# EAGLE board termo2 (EAGLE 6.2)
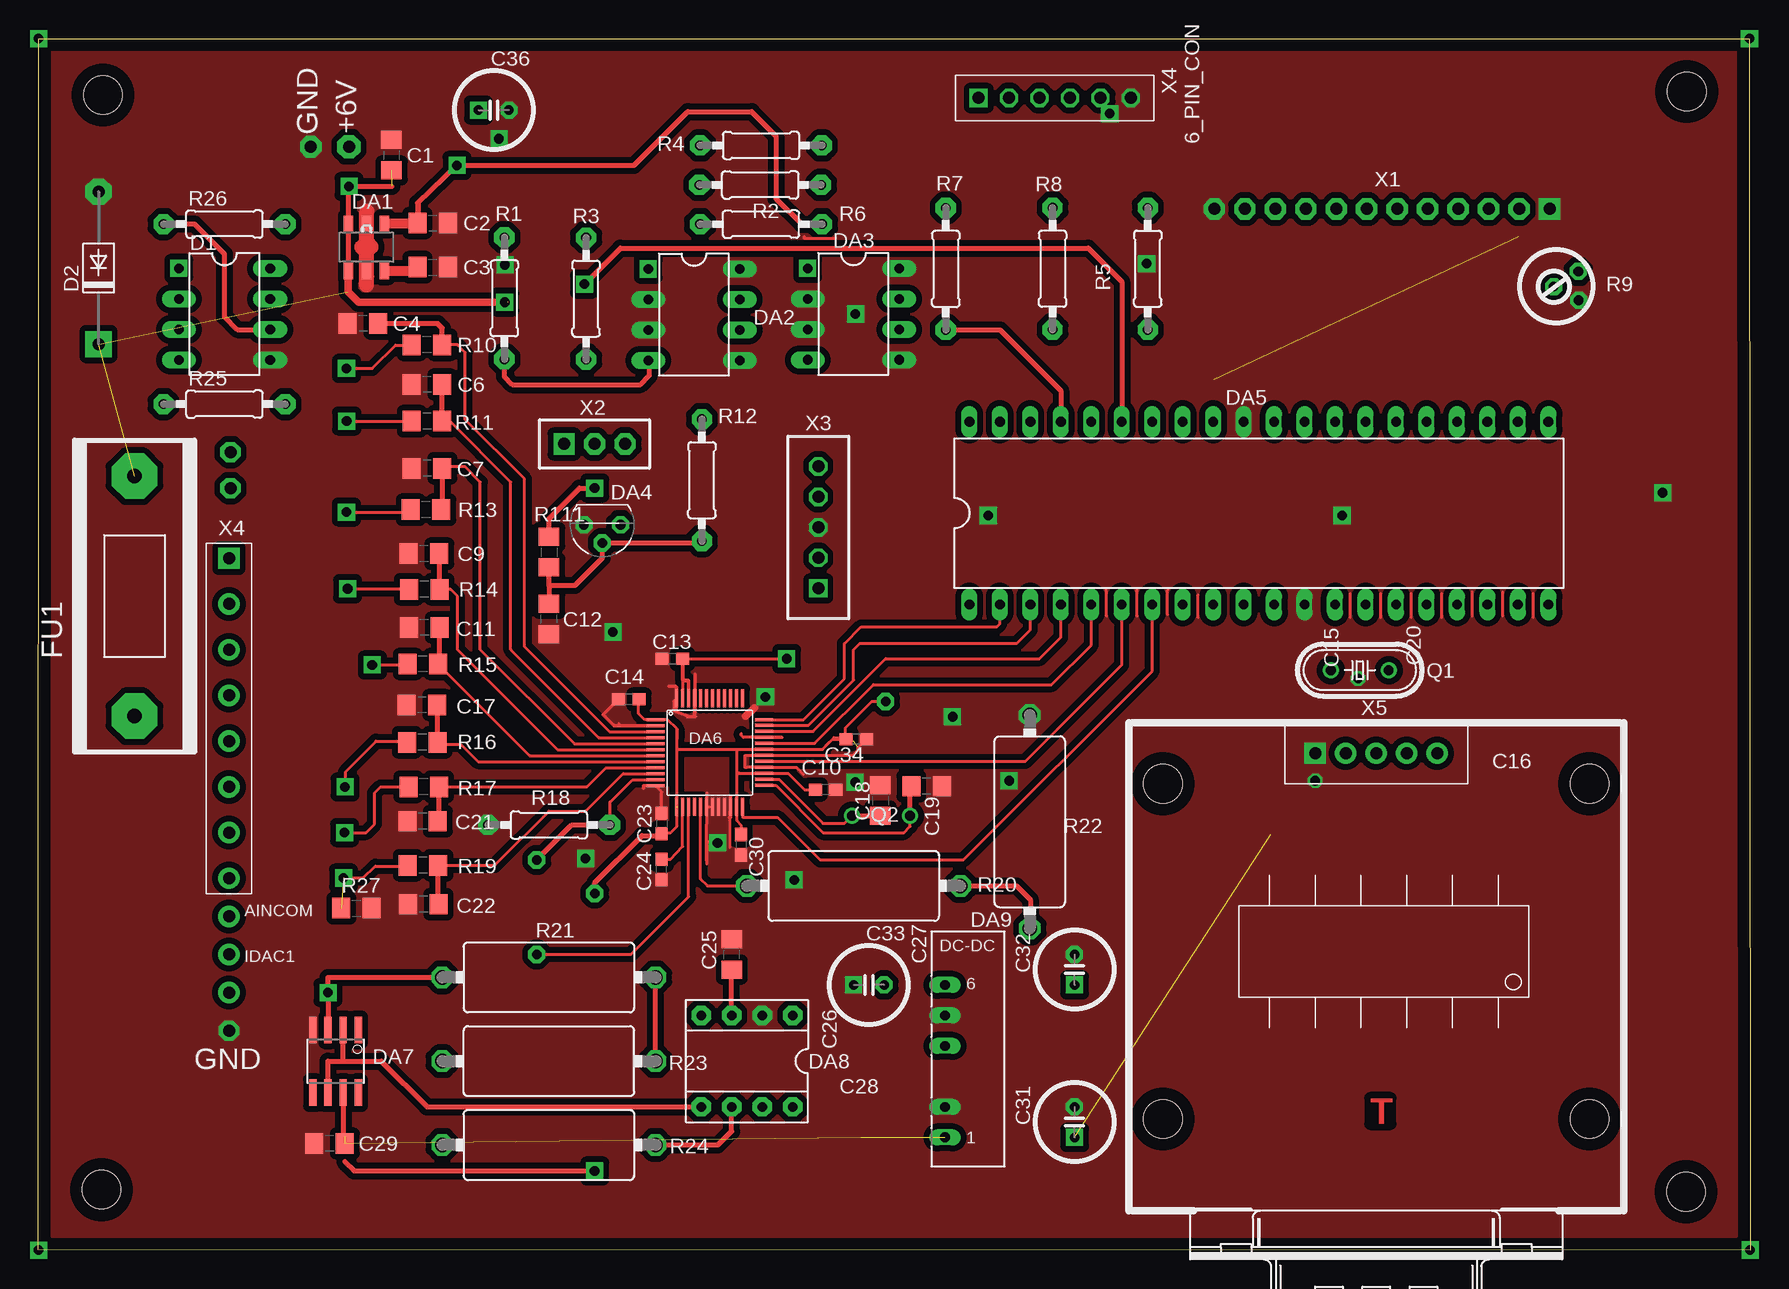
[diagram p0: board, top side]
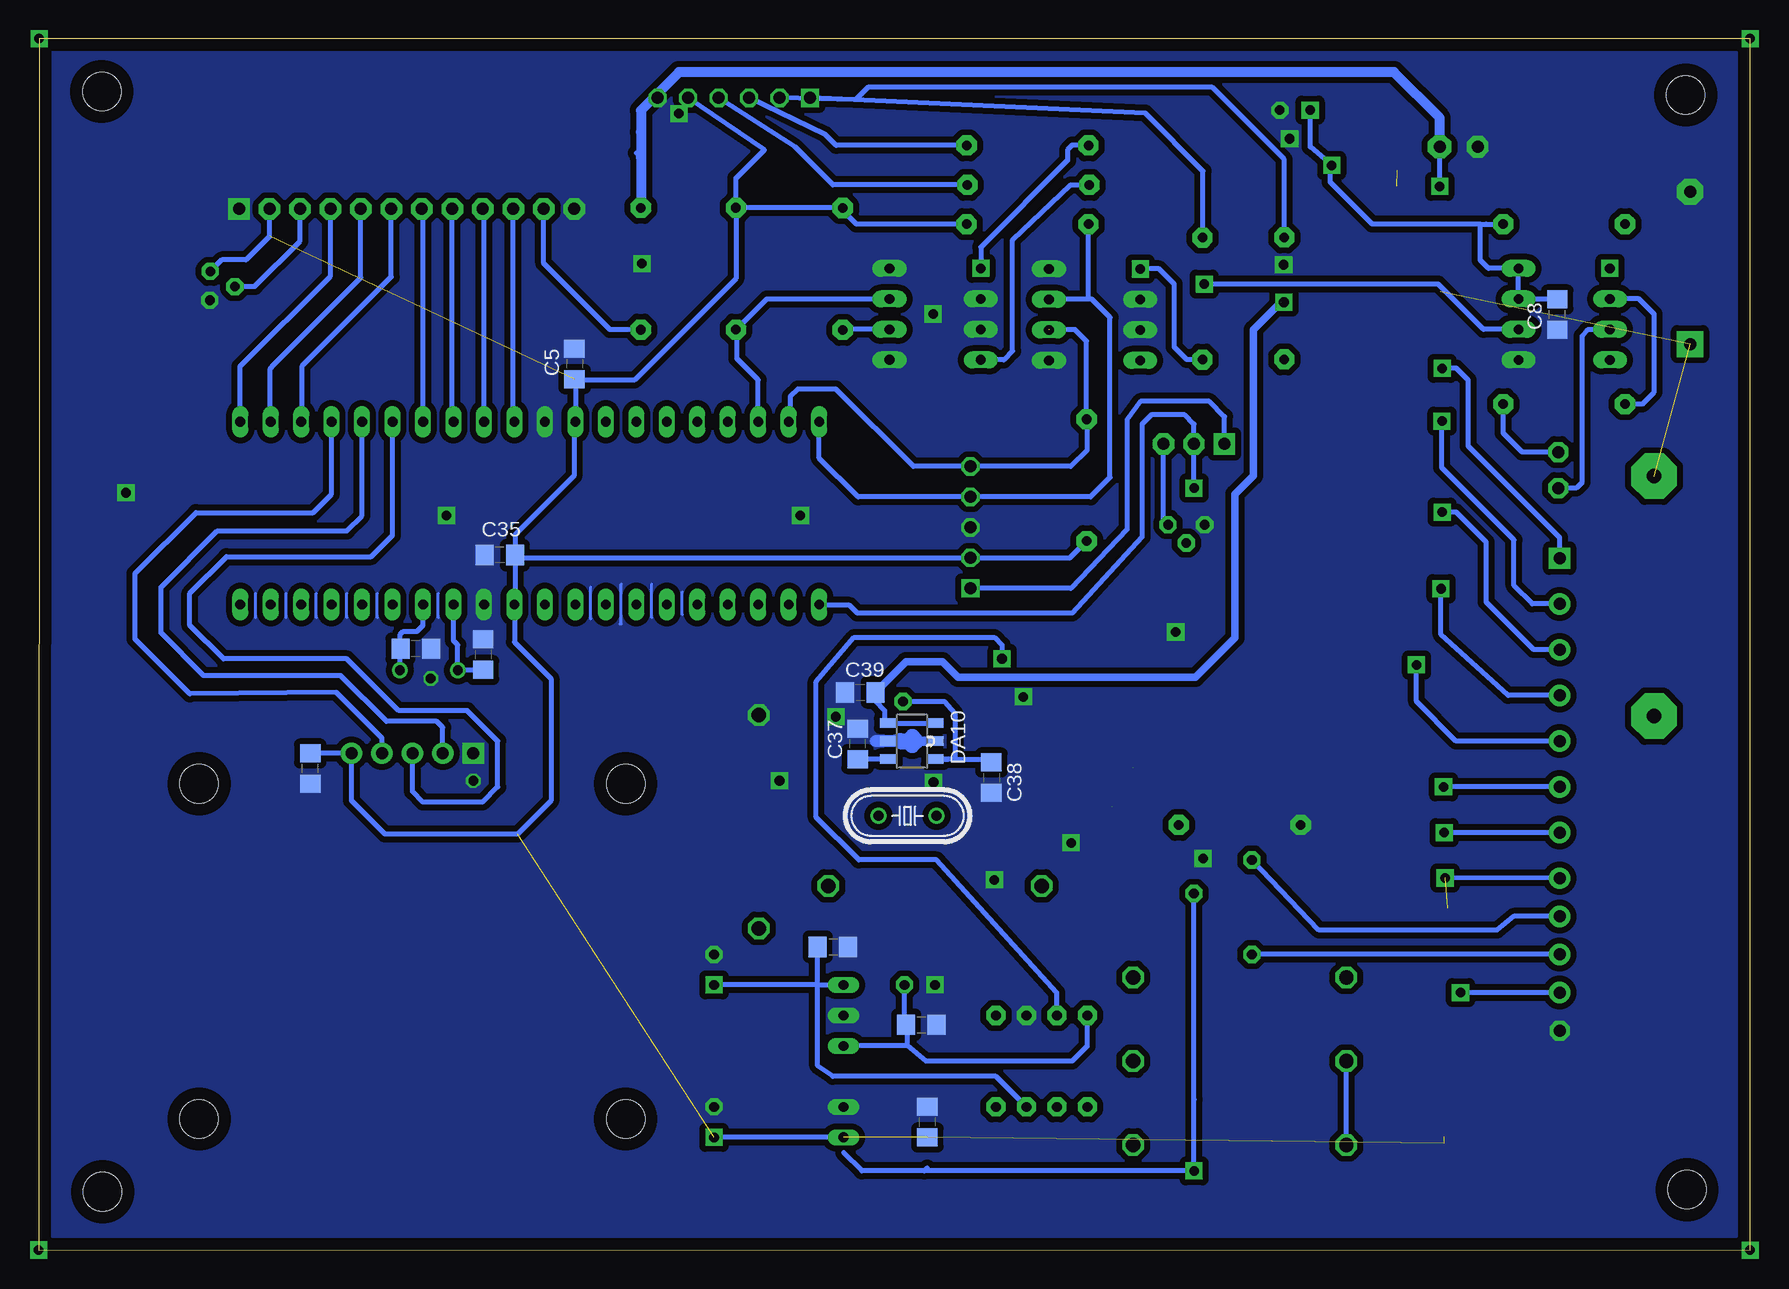
[diagram p1: board, bottom side, seen from below]

Size 142.68 x 100.97 mm. Coordinates in mm from the lower left corner, seen from the top.
Outline: 0,100.97 142.63,100.97 142.68,0 0,0.02 0,100.97
Copper layers (1*16): Top 0.035mm / dielectric 1.5mm / Bottom 0.035mm
Design rules: minimum track width 0.5mil, minimum drill 24mil, track to track 8mil, track to pad 8mil, pad to pad 8mil, via to via 8mil, smd to smd 8mil, copper to edge 40mil, drill to drill 8mil, minimum pad ring 10mil, minimum via ring 8mil, stop-mask expansion 4mil, vias tented up to drill 0mil, thermal gap 10mil
Holes 3.2 mm at 5.37,96.27 137.4,96.57 137.33,4.87 5.25,5.05

## Footprints (pad centres in the part's own frame; a part is rotated, then mirrored left to right if it is on the bottom)
8_PIN_CON = drill 1 pad 1.778 square: P$1 -12.7,0.635 | drill 1 pad 1.778: P$2 -8.89,0.635; P$3 -5.08,0.635; P$4 -1.27,0.635; P$5 2.54,0.635; P$6 6.35,0.635; P$7 10.16,0.635; P$8 13.97,0.635
C0805D = smd 1.5 x 1.7: 1 -1.27,0; 2 1.27,0
C0603 = smd 1.1 x 1: 1 -0.85,0; 2 0.85,0
C100MILX6X12 = drill 0.8 pad 1.422 octagon: MINUS 1.27,0 | drill 0.8 pad 1.422 square: PLUS -1.27,0
DIL08 = drill 0.8 pad 1.422 square: 1 -3.81,-3.81 | drill 0.8 pad 1.422 long: 2 -1.27,-3.81; 3 1.27,-3.81; 4 3.81,-3.81; 5 3.81,3.81; 6 1.27,3.81; 7 -1.27,3.81; 8 -3.81,3.81
DO41-10 = drill 1 pad 2.184 octagon: A 12.7,0 | drill 1 pad 2.184 square: C 0,0
SOT89-5 = smd 0.8 x 1.4: 1 -1.499,-1.981; 2 0,-1.981; 3 1.499,-1.981; 4 1.499,1.919; 5 -1.499,1.919; 21 0,1.919
CNY_DIP8 = drill 0.8 pad 1.422 square: 1 -3.81,-3.81 | drill 0.8 pad 1.422 long: 2 -1.27,-3.81; 3 1.27,-3.81; 4 3.81,-3.81; 5 3.81,3.81; 6 1.27,3.81; 7 -1.27,3.81; 8 -3.81,3.81
TO92-60 = drill 0.8 pad 1.422 octagon: 1 -1.524,0; 2 0,1.524; 3 1.524,0
DIL40 = drill 0.813 long: 1 -24.13,-7.62; 2 -21.59,-7.62; 3 -19.05,-7.62; 4 -16.51,-7.62; 5 -13.97,-7.62; 6 -11.43,-7.62; 7 -8.89,-7.62; 8 -6.35,-7.62; 9 -3.81,-7.62; 10 -1.27,-7.62; 11 1.27,-7.62; 12 3.81,-7.62; 13 6.35,-7.62; 14 8.89,-7.62; 15 11.43,-7.62; 16 13.97,-7.62; 17 16.51,-7.62; 18 19.05,-7.62; 19 21.59,-7.62; 20 24.13,-7.62; 21 24.13,7.62; 22 21.59,7.62; 23 19.05,7.62; 24 16.51,7.62; 25 13.97,7.62; 26 11.43,7.62; 27 8.89,7.62; 28 6.35,7.62; 29 3.81,7.62; 30 1.27,7.62; 31 -1.27,7.62; 32 -3.81,7.62; 33 -6.35,7.62; 34 -8.89,7.62; 35 -11.43,7.62; 36 -13.97,7.62; 37 -16.51,7.62; 38 -19.05,7.62; 39 -21.59,7.62; 40 -24.13,7.62
ADS1216_PAC = smd 0.25 x 1.5: 1 -2.52,-3.258; 2 -2.02,-3.258; 3 -1.52,-3.258; 4 -1.02,-3.258; 5 -0.52,-3.258; 6 -0.02,-3.258; 7 0.48,-3.258; 8 0.98,-3.258; 9 1.48,-3.258; 10 1.98,-3.258; 11 2.48,-3.258; 12 2.98,-3.258; 25 2.955,5.792; 26 2.455,5.792; 27 1.955,5.792; 28 1.455,5.792; 29 0.955,5.792; 30 0.455,5.792; 31 -0.045,5.792; 32 -0.545,5.792; 33 -1.045,5.792; 34 -1.545,5.792; 35 -2.045,5.792; 36 -2.533,5.785 | smd 1.5 x 0.25: 13 4.73,-1.483; 14 4.73,-0.983; 15 4.73,-0.483; 16 4.73,0.017; 17 4.73,0.517; 18 4.73,1.017; 19 4.73,1.517; 20 4.73,2.017; 21 4.73,2.517; 22 4.73,3.017; 23 4.73,3.517; 24 4.73,4.017; 37 -4.32,4.017; 38 -4.32,3.517; 39 -4.32,3.017; 40 -4.32,2.517; 41 -4.32,2.017; 42 -4.32,1.517; 43 -4.32,1.017; 44 -4.32,0.517; 45 -4.32,0.017; 46 -4.32,-0.483; 47 -4.32,-0.983; 48 -4.32,-1.483
SO08 = smd 0.61 x 2.21: 1 -1.905,-2.616; 2 -0.635,-2.616; 3 0.635,-2.616; 4 1.905,-2.616; 5 1.905,2.616; 6 0.635,2.616; 7 -0.635,2.616; 8 -1.905,2.616
DIL08' = drill 0.813 pad 1.6 octagon: 1 -3.81,-3.81; 2 -1.27,-3.81; 3 1.27,-3.81; 4 3.81,-3.81; 5 3.81,3.81; 6 1.27,3.81; 7 -1.27,3.81; 8 -3.81,3.81
NMA = drill 0.813 long: 1 0,6.35; 2 0,3.81; 4 0,-1.27; 5 0,-3.81; 6 0,-6.35
FUSE5X20 = drill 1.2 pad 3.81 octagon: P$1 -10,0; P$2 10,0
1_PIN_CON = drill 1 pad 1.676 octagon: P$1 0,0
HC49/S = drill 0.813: 1 -2.413,0; 2 2.413,0
0207/10 = drill 0.8 pad 1.676 octagon: 1 -5.08,0; 2 5.08,0
RTRIM3329H = drill 0.8 pad 1.422 octagon: 1 -0.599,-2.024; 2 1.805,-1.985; 3 0.537,0.066
R0805D = smd 1.5 x 1.7: P$1 -1.27,0; P$2 1.27,0
V235/17 = drill 1.194 octagon: 1 -8.89,0; 2 8.89,0
WINSTAR16X4_12 = drill 1 pad 1.778 square: P$1 -13.97,1.27 | drill 1 pad 1.778 octagon: P$2 -11.43,1.27; P$3 -8.89,1.27; P$4 -6.35,1.27; P$5 -3.81,1.27; P$6 -1.27,1.27; P$7 1.27,1.27; P$8 3.81,1.27; P$9 6.35,1.27; P$10 8.89,1.27; P$11 11.43,1.27; P$12 13.97,1.27
PLC-3PIN = drill 1 pad 1.778 square: P$1 0,0 | drill 1 pad 1.778 octagon: P$2 2.54,0; P$3 5.08,0
PLC-5PIN = drill 1 square: P$1 0,5.08 | drill 1 octagon: P$2 0,2.54; P$3 0,0; P$4 0,-2.54; P$5 0,-5.08
6_IN_PINS = drill 1 pad 1.422 square: P$1 0,0 | drill 1 pad 1.422 octagon: P$2 2.54,0; P$3 5.08,0; P$4 7.62,0; P$5 10.16,0; P$6 12.7,0
KM_RS_232 = drill 1 pad 1.778 square: 1 20.32,5.08 | drill 1 pad 1.778: 2 20.32,2.54; 3 20.32,0; 4 20.32,-2.54; 5 20.32,-5.08 | hole 3.2: -10.16,17.78; -10.16,-17.78; 17.78,17.78; 17.78,-17.78

## Placement (x,y rotation side)
8_PIN_1  [8_PIN_CON]  15.24,44.96 270 top
C1  0.1u  [C0805D]  29.42,91.26 270 top
C2  1u  [C0805D]  32.86,85.6 0 top
C3  0.01u  [C0805D]  32.86,81.92 0 top
C4  1n  [C0805D]  27.06,77.22 180 top
C5  [C0805D]  98,73.87 270 bottom
C6  [C0805D]  32.39,72.14 180 top
C7  [C0805D]  32.39,65.16 180 top
C8  0.1u  [C0805D]  16.08,77.96 90 bottom
C9  [C0805D]  32.14,58.04 180 top
C10  [C0603]  65.61,38.38 180 top
C11  [C0805D]  32.17,51.89 180 top
C12  0.1u  [C0805D]  42.56,52.58 90 top
C13  0.1u  [C0603]  52.84,49.28 180 top
C14  0.1u  [C0603]  49.21,45.9 180 top
C15  12p  [C0805D]  105.62,49.64 270 bottom
C16  0.1u  [C0805D]  120.02,40.14 90 bottom
C17  [C0805D]  31.98,45.43 180 top
C18  [C0805D]  70.18,37.48 270 top
C19  [C0805D]  74.03,38.66 180 top
C20  12p  [C0805D]  111.23,50.12 180 bottom
C21  [C0805D]  32.02,35.75 180 top
C22  [C0805D]  32.08,28.83 180 top
C23  0.1u  [C0603]  51.95,35.57 270 top
C24  1n  [C0603]  51.95,31.73 90 top
C25  0.1u  [C0805D]  57.79,24.64 90 top
C26  0.1u  [C0805D]  69.09,18.79 0 bottom
C27  0.1u  [C0805D]  76.46,25.28 0 bottom
C28  0.1u  [C0805D]  68.58,10.67 90 bottom
C29  0.1u  [C0805D]  24.26,8.9 180 top
C30  0.1u  [C0603]  58.55,33.79 270 top
C31  [C100MILX6X12]  86.36,10.67 90 top
C32  [C100MILX6X12]  86.36,23.37 90 top
C33  [C100MILX6X12]  69.22,22.1 0 top
C34  0.1u  [C0603]  68.16,42.58 180 top
C35  0.1u  [C0805D]  104.22,57.93 180 bottom
C36  [C100MILX6X12]  37.94,95 0 top
C37  0.01u  [C0805D]  74.39,42.19 90 bottom
C38  1u  [C0805D]  63.25,39.38 270 bottom
C39  0.1u  [C0805D]  74.17,46.49 0 bottom
D1  6N137  [DIL08]  15.5,78.01 270 top
D2  1N5061  [DO41-10]  5,75.51 90 top
DA1  NJM2880  [SOT89-5]  27.34,83.6 0 top
DA2  CNY74-H  [CNY_DIP8]  54.64,77.96 270 top
DA3  CNY74-H  [CNY_DIP8]  67.93,78.01 270 top
DA4  DS1811  [TO92-60]  46.99,60.46 180 top
DA5  PIC18F4320_40  [DIL40]  101.73,61.42 0 top
DA6  ADS1216ADS1216  [ADS1216_PAC]  54.69,41.69 270 top
DA7  OPA340U  [SO08]  24.77,15.75 180 top
DA8  INA128P  [DIL08']  59.06,15.75 180 top
DA9  [NMA]  75.57,15.75 180 top
DA10  NJM2880  [SOT89-5]  69.85,42.42 270 bottom
FU1  [FUSE5X20]  8,54.51 90 top
P1  1_PIN_CON  [1_PIN_CON]  16,66.51 0 top
P2  1_PIN_CON  [1_PIN_CON]  16,63.51 0 top
Q1  [HC49/S]  110.14,48.34 0 top
Q2  [HC49/S]  70.24,36.2 180 bottom
R1  330  [0207/10]  38.84,79.32 90 top
R2  330  [0207/10]  60.17,88.77 0 top
R3  330  [0207/10]  45.64,79.3 270 top
R4  330  [0207/10]  60.22,92.06 180 top
R5  1k  [0207/10]  92.47,81.78 270 top
R6  4k7  [0207/10]  60.23,85.5 0 top
R7  4k7  [0207/10]  75.63,81.77 90 top
R8  4k7  [0207/10]  84.54,81.79 90 top
R9  [RTRIM3329H]  126.37,79.76 90 top
R10  1k  [R0805D]  32.39,75.44 180 top
R11  [R0805D]  32.39,69.09 180 top
R12  4k7  [0207/10]  55.3,64.17 270 top
R13  [R0805D]  32.3,61.71 180 top
R14  [R0805D]  32.16,55.07 180 top
R15  [R0805D]  32.05,48.85 180 top
R16  [R0805D]  31.99,42.32 180 top
R17  [R0805D]  32.11,38.61 180 top
R18  100k  [0207/10]  42.55,35.44 180 top
R19  [R0805D]  32.05,32.07 180 top
R20  100k  [V235/17]  67.95,30.36 0 top
R21  250k  [V235/17]  42.55,22.74 0 top
R22  100k  [V235/17]  82.63,35.7 90 top
R23  250k  [V235/17]  42.55,15.75 180 top
R24  250k  [V235/17]  42.55,8.77 0 top
R25  330  [0207/10]  15.5,70.51 0 top
R26  1k  [0207/10]  15.5,85.51 0 top
R27  10k  [R0805D]  26.5,28.51 0 top
R111  10k  [R0805D]  42.56,58.17 270 top
X1  [WINSTAR16X4_12]  111.99,88.04 180 top
X2  [PLC-3PIN]  43.82,67.19 0 top
X3  [PLC-5PIN]  65,60.23 180 top
X4  6_PIN_CON  [6_IN_PINS]  78.36,96.02 0 top
X5  [KM_RS_232]  111.51,21.09 90 top

## Library data of the parts
8_PIN_1 DA2 DA3 DA6 P1 P2 R9 X1 X4 X5 = Dmitry
C1-C9 C11 C12 C15-C22 C25-C29 C31-C33 C35-C39 D1 D2 DA1 DA4 DA10 FU1 R1-R8 R10-R19 R25-R27 R111 X2 X3 = den
C10 C13 C14 C23 C24 C30 C34 R20-R24 = rcl
DA5 = microchip
DA7 DA8 = burr-brown
DA9 = dc-dc-converter
Q1 Q2 = crystal

## Nets
1: DA5.1 R111.P$1 X2.P$2
+5V: C2.1 C5.2 C8.2 C12.2 C16.2 C28.1 C29.1 C31.PLUS C35.1 C36.PLUS D1.7 D1.8 DA1.4 DA4.2 DA5.11 DA5.32 DA7.7 DA9.1 R6.2 R7.2 R8.2 R9.2 R12.2 R26.2 R111.P$2 X1.P$2 X3.P$2 X4.P$5 X5.5
+5V_AVDD: C10.2 C14.1 C23.2 C30.1 C34.2 C38.1 DA6.1 DA6.13 DA6.23 DA6.27 DA6.31 DA10.4
+6V: C1.2 C39.2 D2.C DA1.1 DA1.5 DA10.1 DA10.5 FU1.P$2 R5.1
AINCOM: DA6.11 R18.1
D_IN: DA5.3 DA6.35
D_OUT: DA5.2 DA6.36
DB4: DA5.27 X1.P$7
DB5: DA5.28 X1.P$8
DB6: DA5.29 X1.P$9
DB7: DA5.30 X1.P$10
DRDY: DA5.5 DA6.32
DSYNC: DA5.6 DA6.29
E: DA5.23 X1.P$6
IDAC1: DA6.15
IN1.1: C4.1 DA6.3 R10.P$1
IN1.2: C6.1 DA6.4 R11.P$1
IN2.1: C7.1 DA6.5 R13.P$1
IN2.2: C9.1 DA6.6 R14.P$1
IN3.1: C11.1 DA6.7 R15.P$1
IN3.2: C17.1 DA6.8 R16.P$1
IN4.1: C21.1 DA6.9 R17.P$1
IN4.2: C22.1 DA6.10 R19.P$1
INA_OUT: DA7.3 R21.1
K1: X4.P$1
K2: R1.2 X4.P$2
K3: R4.1 X4.P$3
K4: R2.2 X4.P$4
KN1,PGD: DA2.7 DA5.40 R6.1 X3.P$4
KN2,PGC: DA2.6 DA5.39 R12.1 X3.P$5
KN3: DA3.7 DA5.38 R8.1
KN4: DA3.6 DA5.37 R7.1
MCLR: X2.P$1 X3.P$1
N$1: C15.2 DA5.13 Q1.1
N$2: C20.2 DA5.14 Q1.2
N$3: DA2.4 R1.1
N$4: C3.1 DA1.3
N$7: C24.2 DA6.14
N$8: DA4.1 X2.P$3
N$10: C19.2 DA6.25 Q2.2
N$11: C18.2 DA6.26 Q2.1
N$13: 8_PIN_1.P$6 R16.P$2
N$14: 8_PIN_1.P$1 R10.P$2
N$15: 8_PIN_1.P$2 R11.P$2
N$16: 8_PIN_1.P$7 R17.P$2
N$17: DA3.1 R4.2
N$18: 8_PIN_1.P$8 R19.P$2 R27.P$1
N$19: DA3.4 R2.1
N$20: R5.2 X1.P$11
N$28: 8_PIN_1.P$5 R15.P$2
N$29: C27.1 C32.PLUS DA8.7 DA9.6
N$30: 8_PIN_1.P$3 R13.P$2
N$31: 8_PIN_1.P$4 R14.P$2
N$45: DA7.2 DA7.6 DA8.5
N$47: DA8.6 R24.2
N$51: C26.1 C33.MINUS DA8.4 DA9.4
N$56: DA5.26 X5.3
N$58: DA5.25 X5.2
N$59: DA5.24 X5.4
N$62: R23.2 R24.1
N$63: R21.2 R23.1
N$64: DA6.17 R20.1
N$65: R20.2 R22.1
N$105: C37.1 DA10.3
N$106: R3.1
N$108: D1.6 DA5.35 R26.1
N$109: D1.2 R25.1
N$110: D1.3 P2.P$1
N$112: P1.P$1 R25.2
N$113: DA6.33
PE: C1.1 C2.2 C3.2 C4.2 C5.1 C6.2 C7.2 C8.1 C9.2 C10.1 C11.2 C12.1 C13.2 C14.2 C15.1 C16.1 C17.2 C18.1 C19.1 C20.1 C21.2 C22.2 C23.1 C24.1 C25.2 C26.2 C27.2 C28.2 C29.2 C30.2 C31.MINUS C32.MINUS C33.PLUS C34.1 C35.2 C36.MINUS C37.2 C38.2 C39.1 D1.5 D2.A DA1.2 DA1.21 DA2.2 DA2.3 DA2.5 DA2.8 DA3.2 DA3.3 DA3.5 DA3.8 DA4.3 DA5.12 DA5.31 DA6.2 DA6.12 DA6.18 DA6.19 DA6.20 DA6.21 DA6.22 DA6.28 DA6.30 DA6.45 DA6.48 DA7.4 DA8.2 DA9.2 DA9.5 DA10.2 DA10.21 R9.1 R18.2 R22.2 R27.P$2 X1.P$1 X1.P$12 X3.P$3 X4.P$6 X5.1
R15: DA2.1 R3.2
REF: C13.1 C25.1 DA6.46 DA6.47 DA8.3
RESET: DA5.7 DA6.24
RS: DA5.21 X1.P$4
RW: DA5.22 X1.P$5
SCLK: DA5.4 DA6.34
V0CON: R9.3 X1.P$3
VDD: FU1.P$1

## Tracks (layer width: path | path; a pad name or v marks a point on that pad's centre or on a via)
1  (via drill 0.8 pad 1.42)
  Top 0.406: R111.P$1 42.56,60.97 45.1,63.51 v46.36,63.51
  Bottom 0.406: v46.36,63.51 X2.P$2 46.36,68.84 47.12,69.6 49.92,69.6 50.68,68.84 50.68,59.44 56.52,53.09 74.43,53.09 75.06,53.73 77.53,53.73 DA5.1
+5V  (via drill 0.8 pad 1.42)  (5 unrouted)
  Top 0.406: 31.59,87.25 v34.88,90.41 49.64,90.41 49.87,90.64 | 42.56,55.38 C12.2 43.08,53.88 | 42.56,55.38 R111.P$2 | 31.59,87.25 C2.1 | 42.56,55.38 44.71,55.38 46.99,57.66 DA4.2 55.15,58.93 R12.2 | R8.2 84.46,86.79 | 31.64,85.52 31.64,87.2 31.59,87.25 | 49.87,90.64 54.11,94.87 59.44,94.87 61.47,92.84 61.47,87.64 63.63,85.48 65.29,85.48 R6.2 | 49.87,90.64 49.66,90.43 | DA7.7 25.44,13.1 25.44,9.55 25.53,9.46
  Top 0.813: DA1.4 31.64,85.52 C2.1
  Bottom 0.406: R12.2 56.7,57.69 X3.P$2 102.71,57.69 C35.1 | C36.PLUS 36.67,91.95 v34.88,90.41 35,90.28 35,89.01 31.5,85.51 22.5,85.51 | C35.1 102.95,53.8 DA5.11 103,50.68 99.95,47.63 99.95,37.47 102.75,34.68 113.8,34.68 116.59,37.47 X5.5 C16.2 | C35.1 102.95,59.62 98.03,64.54 98.03,68.93 DA5.32 97.92,72.02 C5.2 97.59,72.51 93,72.51 84.54,80.97 R8.2 | 65.3,85.49 R6.2 74.5,85.51 75.63,86.63 R7.2 84.52,86.85 arc90 R8.2 | R8.2 84.54,89.34 82.17,91.7 X4.P$5 | C8.2 19.35,79.24 D1.7 D1.8 21.81,81.82 22.5,82.51 22.5,85.51 | 22,85.51 R26.2 | 22,85.51 20.5,85.51 | 22.5,85.51 22,85.51 | R9.2 127.39,82.54 125.37,82.54 123.42,84.49 X1.P$2 | DA9.1 C31.PLUS
+5V_AVDD  (via drill 0.8 pad 1.42)  (1 unrouted)
  Top 0.254: DA6.13 53.22,36.95 53.22,35.31 52.71,34.8 52.04,34.8 C23.2 | DA6.23 58.2,35.82 58.55,35.41 C30.1 | DA6.23 | 58.2,39.73 58.19,39.73 | 58.42,39.73 DA6.27 | 58.42,39.73 58.21,39.73 | 53.22,36.97 53.22,41.66 | 53.22,41.66 53.22,43.44 | 53.22,43.44 53.21,41.74 | 64.16,41.73 DA6.31 58.2,41.73 | 58.2,41.73 | 58.2,41.73 53.29,41.73 53.22,41.66 | 58.2,39.73 58.42,39.73 | 58.2,41.73 58.2,39.73 | DA6.23 58.2,39.73 | 53.22,43.44 52.46,44.2 DA6.1 50.54,44.21 50.04,44.71 50.04,45.89 C14.1 | 64.16,41.73 64.47,41.74 65.36,41.74 65.66,42.04 | C10.2 63.85,38.38 62.5,39.73 DA6.27 | DA6.27 | 65.66,42.04 66.21,42.58 C34.2 | 64.16,41.73 65.36,41.73 65.66,42.04 | 65.66,42.04 65.66,42.08 66.3,42.72 67.15,42.72 67.26,42.6 67.26,43.52 69.47,45.73 v70.62,45.73
  Top 0.406: v46.36,6.61 26.29,6.61 25.53,7.37 | v46.36,29.72 46.36,30.62 50.3,34.55 51.78,34.55 C23.2
  Bottom 0.406: 67.31,40.91 66.89,40.9 | v70.62,45.73 67.19,45.73 66.3,44.71 66.3,41.04 66.43,40.91 | DA10.4 67.31,40.92 67.31,40.91 | C38.1 63.51,40.91 66.43,40.91 | 66.43,40.91 67.31,40.91 | v46.36,29.72 46.36,12.57 v46.36,6.61 68.84,6.61 | 75.57,8.13 74.05,6.61 68.84,6.61 | 68.84,6.61 68.58,6.86
+6V  (via drill 0.8 pad 1.42, 1 pad 1.93)  (4 unrouted)
  Top 0.406: DA1.1 DA1.5 25.84,88.62 v25.88,88.65 29.47,88.65
  Top 0.61: DA1.1 25.82,81.6 25.82,79.85 26.67,79 v38.87,79 39.12,79
  Bottom 0.406: v25.88,88.65 v25.88,91.95 | DA10.5 DA10.1 72.14,44.23 72.14,44.96 72.9,45.73 C39.2 | 92.45,91.06 92.84,91.45
  Bottom 0.61: C39.2 70.36,49.03 67.31,49.03 66.04,47.76 46.23,47.76 42.94,51.05 42.93,63 41.41,64.52 41.41,76.72 39.13,79
  Bottom 0.813: v25.88,91.95 25.88,94.37 29.69,98.18 89.28,98.18 92.45,94.99 92.46,93.17 92.45,91.45 92.45,91.06 R5.1
AINCOM  (via drill 0.8 pad 1.42, 1 pad 1.8)
  Top 0.254: DA6.11 51.39,39.2 49.53,39.2 47.63,37.34 R18.1
  Top 0.406: R18.1 44.45,35.44 v41.53,32.52
  Bottom 0.406: v15.88,27.82 19.7,27.82 21.1,26.68 35.95,26.68 v41.53,32.52
D_IN
  Top 0.254: DA6.35 64.18,43.73 67.95,47.5 67.95,50.04 68.47,50.56 81.55,50.56 82.68,51.69 DA5.3
D_OUT
  Top 0.254: DA6.36 63.78,44.22 67.19,47.63 67.19,50.55 68.58,51.95 79.89,51.95 80.14,52.2 DA5.2
DB4
  Bottom 0.406: DA5.27 110.62,86.67 X1.P$7
DB5
  Bottom 0.406: X1.P$8 108.18,69.14 DA5.28
DB6
  Bottom 0.406: DA5.29 105.54,86.67 X1.P$9
DB7
  Bottom 0.406: X1.P$10 103.1,69.14 DA5.30
DRDY
  Top 0.254: DA6.32 64.7,42.23 69.6,47.12 84.46,47.12 87.76,50.42 DA5.5
DSYNC
  Top 0.254: DA6.29 82.26,40.73 90.3,48.77 DA5.6
E
  Bottom 0.406: X1.P$6 113.26,81.12 120.68,73.7 120.68,69.14 DA5.23
IDAC1  (via drill 0.8 pad 1.42, 1 pad 1.8)
  Top 0.254: DA6.15 54.21,29.47 49.38,24.64 v41.53,24.64
  Bottom 0.406: v15.88,24.64 v41.53,24.64
IN1.1
  Top 0.254: DA6.3 47.6,43.21 40.52,50.3 40.52,64.27 35.56,69.22 35.56,74.81 34.93,75.44 R10.P$1
  Top 0.406: R10.P$1 33.66,76.84 33.28,77.22 C4.1
IN1.2
  Top 0.254: DA6.4 46.71,42.71 39.37,50.04 39.37,64.01 34.29,69.09 R11.P$1
  Top 0.406: R11.P$1 C6.1
IN2.1
  Top 0.254: DA6.5 51.42,42.2 44.68,42.2 36.83,50.04 36.83,64.01 35.56,65.28 33.79,65.28 C7.1
  Top 0.406: R13.P$1 33.66,61.71 C7.1
IN2.2
  Top 0.254: R14.P$1 34.35,55.07 34.93,54.49 34.93,50.04 43.26,41.71 DA6.6
  Top 0.406: 33.43,58.04 C9.1 | 33.43,58.04 33.68,58.04 | R14.P$1 33.43,58.04
IN3.1
  Top 0.254: DA6.7 40.96,41.21 R15.P$1
  Top 0.406: R15.P$1 33.44,48.85 C11.1
IN3.2
  Top 0.254: DA6.8 36.64,40.71 35.18,42.17 33.41,42.17 R16.P$1
  Top 0.406: C17.1 33.26,45.43 R16.P$1
IN4.1  (1 unrouted)
  Top 0.254: DA6.9 47.31,40.2 46.42,39.31 | 46.42,39.31 46.36,39.25 | R17.P$1 45.72,38.61 46.42,39.31
  Top 0.406: C21.1 33.38,35.25 R17.P$1
IN4.2
  Top 0.254: DA6.10 51.43,39.72 48.73,39.72 45.6,36.58 42.55,36.58 38.04,32.07 R19.P$1
  Top 0.406: C22.1 33.32,28.2 R19.P$1
INA_OUT  (via drill 0.8 pad 1.42, 1 pad 1.8)
  Top 0.406: R21.1 24.13,22.74 v24.13,21.47 DA7.3
  Bottom 0.406: v15.88,21.47 v24.13,21.47
K1
  Bottom 0.406: X4.P$1 50.42,94.75 45.6,89.92 45.6,84.33
K2
  Bottom 0.406: R1.2 38.84,90.91 44.84,96.91 73.54,96.91 74.55,95.89 X4.P$2
K3
  Bottom 0.406: R4.1 76.19,92.06 77.09,92.97 X4.P$3
K4
  Bottom 0.406: R2.2 76.45,88.77 79.63,91.95 X4.P$4
KN1,PGD
  Bottom 0.406: DA5.40 77.6,66.01 74.35,62.77 X3.P$4 54.97,62.77 53.34,64.39 53.34,77.73 54.87,79.25 55,79.25 | 55,79.25 58.42,79.25 DA2.7 | R6.1 55.15,79.25 55,79.25
KN2,PGC  (1 unrouted)
  Bottom 0.406: 58.42,76.71 56.27,76.71 55.3,75.75 R12.1 55.25,69.69 55.25,66.68 56.62,65.31 X3.P$5 69.75,65.31 76.2,71.76 79.38,71.76 80.01,71.13 80.01,69.17 DA5.39
KN3
  Bottom 0.406: DA3.7 81.97,79.28 R8.1 84.46,76.63 84.46,74.3 82.68,72.52 DA5.38
KN4
  Top 0.406: R7.1 80.16,76.69 85.22,71.63 DA5.37
  Bottom 0.406: DA3.6 75.58,76.74 R7.1
MCLR
  Bottom 0.406: X2.P$1 43.82,69.47 45.09,70.74 50.8,70.74 51.95,69.22 51.95,60.08 56.62,55.15 X3.P$1
N$1
  Bottom 0.406: DA5.13 108.08,50.81 107.72,50.45 Q1.1 105.65,48.34 C15.2
N$2
  Bottom 0.406: Q1.2 112.55,50.58 C20.2 112.53,49.89 112.53,51.31 112.27,51.57 111.13,51.57 110.62,52.08 DA5.14
N$3
  Top 0.406: R1.1 38.84,72.81 39.5,72.14 50.17,72.14 50.93,72.9 50.93,74 DA2.4
N$4
  Top 0.813: C3.1 31.29,81.62 DA1.3
N$7
  Top 0.254: C24.2 52.7,32.58 53.71,33.64 DA6.14
N$8
  Bottom 0.406: X2.P$3 48.9,60.84 DA4.1
N$10
  Top 0.254: Q2.2 72.65,35.68 72.65,35.31 72.14,34.8 65.41,34.8 61.48,38.73 DA6.25 | 72.65,38.66 C19.2
  Top 0.406: Q2.2 72.65,38.66
N$11
  Top 0.254: C18.2 | DA6.26 61.73,39.23 65.39,35.57 67.19,35.57 Q2.1
  Top 0.406: Q2.1 C18.2
N$13  (via drill 0.8 pad 1.42)
  Top 0.254: R16.P$2 30.62,42.42 28.14,42.42 25.59,39.87 25.59,38.65 v25.55,38.61
  Bottom 0.406: 8_PIN_1.P$6 v25.55,38.61
N$14  (via drill 0.8 pad 1.42)
  Top 0.254: v25.67,73.49 27.82,73.49 29.76,75.43 31.11,75.43 R10.P$2
  Bottom 0.406: v25.67,73.49 24.65,73.51 24.5,73.51 23.5,72.51 23.5,67.01 15.88,59.38 8_PIN_1.P$1
N$15  (via drill 0.8 pad 1.42)
  Top 0.254: 31.75,69.09 R11.P$2 v25.69,69.09
  Bottom 0.406: 8_PIN_1.P$2 18.17,53.85 19.69,55.38 19.69,59.19 25.5,65.01 | 25.5,65.01 | 25.5,65.01 25.71,65.21 25.71,69.08 v25.69,69.09
N$16  (via drill 0.8 pad 1.42)
  Top 0.254: R17.P$2 28.5,38.61 28,38.11 28,35.51 27.3,34.8 v25.51,34.8
  Bottom 0.406: 8_PIN_1.P$7 v25.51,34.8
N$17
  Bottom 0.406: DA3.1 64.12,83.59 56.9,90.81 56.9,91.7 56.52,92.08 55.16,92.08 R4.2
N$18  (via drill 0.8 pad 1.42)  (1 unrouted)
  Top 0.254: R19.P$2 30.59,31.63 30.21,32.01 28.07,32.01 27.08,31.02 v25.43,31.02
  Bottom 0.406: 8_PIN_1.P$8 v25.43,31.02
N$19
  Bottom 0.406: DA3.4 62.21,74.2 61.47,74.94 61.47,84.21 56.65,88.78 R2.1
N$20
  Bottom 0.406: X1.P$11 100.56,82.24 95.03,76.71 92.48,76.71 R5.2
N$28  (via drill 0.8 pad 1.42)
  Top 0.254: v27.82,48.77 30.7,48.77
  Top 0.406: 30.7,48.77 R15.P$2
  Bottom 0.406: v27.82,48.77 27.82,45.73 24.52,42.42 8_PIN_1.P$5
N$29
  Bottom 0.406: 77.73,22.1 DA9.6 | 77.73,22.1 77.73,15.37 76.46,14.48 62.87,14.48 DA8.7 | 77.73,22.1 C27.1 | 77.73,22.1 C32.PLUS
N$30  (via drill 0.8 pad 1.42)
  Top 0.254: v25.67,61.5 v25.68,61.51 30.83,61.51 R13.P$2
  Bottom 0.406: 8_PIN_1.P$3 18.04,50.04 22,54.01 22,59.01 24.5,61.51 25.53,61.51 v25.67,61.5
N$31  (via drill 0.8 pad 1.42)
  Top 0.254: v25.77,55.12 30.48,55.12 30.48,54.49 30.89,54.49 R14.P$2
  Bottom 0.406: 8_PIN_1.P$4 20.2,46.23 25.77,51.31 v25.77,55.12
N$45
  Top 0.406: DA7.6 24.13,15.75 25.4,15.75 | 25.4,15.75 28.58,15.75 32.39,11.94 DA8.5 | 25.4,15.75 DA7.2
N$47
  Top 0.406: R24.2 56.65,8.77 57.79,9.91 DA8.6
N$51
  Bottom 0.406: DA8.4 55.25,17.02 56.52,15.75 68.71,15.75 70.24,17.02 | C33.MINUS 70.49,18.92 C26.1 70.24,18.66 70.24,17.02 | 70.24,17.02 DA9.4
N$56
  Bottom 0.406: DA5.26 113.16,59.57 114.94,57.79 127,57.79 130.05,54.74 130.05,52.08 127.26,49.28 116.97,49.28 112.65,44.96 106.94,44.96 104.4,42.42 104.4,38.61 105.67,37.34 110.62,37.34 111.51,38.23 X5.3
N$58
  Bottom 0.406: DA5.25 115.7,61.22 116.97,59.95 127.77,59.95 132.47,55.25 132.47,51.44 128.91,47.88 117.48,47.88 113.67,44.07 109.48,44.07 108.97,43.57 X5.2
N$59
  Bottom 0.406: DA5.24 118.24,63 119.77,61.47 129.54,61.47 134.62,56.39 134.62,50.93 130.05,46.36 117.86,46.49 114.05,42.68 X5.4
N$62
  Bottom 0.406: R24.1 R23.2
N$63
  Top 0.406: R23.1 R21.2
N$64
  Top 0.254: DA6.17 55.21,30.91 55.76,30.36 R20.1
  Top 0.406: R20.1
N$65
  Top 0.406: R20.2 81.54,30.36 82.68,29.22 82.68,26.87 R22.1
N$73
  Top 0.406: 27.78,81.16 27.78,83.7
N$96  (via drill 0.8 pad 1.42)
  other vias: 27.82,48.77
N$100  (via drill 0.8 pad 1.42)
  other vias: 0,0.01
N$101  (via drill 0.8 pad 1.42)
  other vias: 0,100.97
N$102  (via drill 0.8 pad 1.42)
  other vias: 142.62,100.97
N$103  (via drill 0.8 pad 1.42)
  other vias: 142.67,0.01
N$104  (via drill 0.8 pad 1.42)
  other vias: 25.88,88.65
N$105
  Bottom 0.406: DA10.3 72.34,40.92 C37.1
N$108  (via drill 0.8 pad 1.42)
  Top 0.406: R26.1 13,85.51 15.5,83.01 15.5,77.78 16.57,76.72 19.3,76.72 D1.6 | DA5.35 90.3,80.71 87.5,83.51 48.5,83.51 v45.5,80.51
  Bottom 0.406: D1.6 22.23,76.74 26,80.51 v45.5,80.51
N$109
  Bottom 0.406: D1.2 9.27,79.28 8,78.01 8,71.51 9,70.51 R25.1
N$110
  Bottom 0.406: P2.P$1 14.5,63.51 14,64.01 14,76.18 13.52,76.74 D1.3
N$112
  Bottom 0.406: P1.P$1 19,66.51 20.58,68.09 R25.2
N$113
  Top 0.254: DA6.33 62,42.74 61.12,42.74 58.75,42.74 58.57,42.92 58.57,43.04
PE  (via drill 0.8, 0.8 pad 1.42, 1 pad 1.68, 1 pad 1.8)  (1 unrouted)
  Top 0.254: 53.21,46.87 DA6.48 52.96,45.77 52.96,44.96 54.23,44.49 54.61,44.49 54.78,44.49 54.03,44.46 54.74,44.46 54.71,44.49 | 55.76,38.11 55.72,38.11 55.72,36.95 | 57.71,36.07 57.54,36.07 | 57.71,36.07 57.71,37.79 | 57.63,33.57 57.63,36.15 | 55.72,32.18 55.71,34.05 56.5,34.05 v56.61,33.94 | 48.36,43.9 48.57,43.71 50.78,43.71 50.82,43.71 DA6.2 | 55.72,36.95 DA6.18 DA6.19 | 55.72,36.95 55.72,35.82 55.72,35.52 55.71,35.51 55.71,32.47 | DA6.22 57.71,36.64 57.63,36.56 57.63,36.33 57.63,36.15 | 57.63,36.15 57.71,36.07 | DA6.28 | DA6.28 59.82,40.24 | DA6.28 62,40.24 | C23.1 51.95,38.19 DA6.12 | DA6.28 60.47,40.24 59.06,40.24 58.96,40.24 58.89,40.24 58.89,41.23 DA6.30 67.9,41.23 68.33,41.66 68.33,41.9 C34.1 | DA6.28 63.2,40.24 63.27,40.18 63.27,40.15 | 63.27,40.15 63.19,40.24 | 63.27,40.15 63.76,39.63 | 89.03,52.84 89.03,55.12 | 91.57,52.84 91.57,55 | 94.11,52.96 94.11,55 | 96.65,52.71 96.65,54.62 | 109.35,52.71 109.35,54.74 | 111.89,52.71 111.89,54.74 | 114.43,52.71 114.43,54.74 | 116.97,52.71 116.97,54.74 | 119.51,52.84 119.51,54.87 | 122.05,52.84 122.05,54.87 | 124.59,52.71 124.59,54.74 | 66.37,84.32 63.83,84.32 63.83,84.47
  Top 0.28: DA6.12 50.46,38.71 50.44,38.69 50.44,38.5 50.45,38.48
  Top 0.305: 54.71,44.96 54.71,44.58 54.61,44.49 | 54.71,44.96 DA6.45 | 54.69,44.78 54.71,44.78 54.71,44.96 | 54.71,44.96 54.71,47.98 | 54.71,44.96 | 52.96,44.96 53.03,44.96 53.15,45.08 53.15,45.28 53.18,45.32 53.18,46.9 53.09,47 52.58,47 | DA6.2 47.98,43.71 47.07,44.63 47.08,44.63 C14.2
  Top 0.61: 58.95,44.51 59.69,45.22
  Top 1.27: 27.34,80.45 DA1.2 DA1.21 27.36,86.58
  Bottom 0.254: 89.03,52.96 89.03,54.87 | 91.57,52.71 91.57,55.5 | 94.24,52.2 94.11,52.2 94.11,55.5 | 96.65,52.58 96.65,55.25 | 116.97,52.71 116.97,54.74 | 119.51,52.71 119.51,54.74 | 122.05,52.71 122.05,54.74 | 124.59,52.71 124.59,54.74 | 114.43,52.71 114.43,54.74 | 109.35,52.71 109.35,54.74
  Bottom 0.813: 70.82,42.68 70.11,42.68 70.11,42.42 71.12,42.42 71.38,42.42 DA10.2 70.82,42.68 | 70.11,42.17 70.87,42.17 70.87,42.68 70.82,42.68
  Bottom 1.016: 71.38,42.42 72.9,42.42
  other vias: 15.88,18.29 76.2,44.46 47.88,51.52 60.58,46.11 45.6,32.64 80.9,39.12 22.7,91.95 106.43,39.12 92.38,82.21 79.17,61.23 63,30.87 109.99,47.63 68.08,38.99 135.39,63.12 89.29,94.71 38.39,92.62 68.1,78.02 38.89,82.12 108.67,61.23
  pour Bottom (isolate 0.5, no thermals): 142.88,0.13 142.63,100.97 0.26,100.84 -3.81,-3.55
  pour Top (isolate 0.5, no thermals): 0.26,100.97 143.01,101.35 143.01,0.13 -5.08,-3.55
R15
  Bottom 0.406: 45.6,74.26 R3.2 46.96,74.22 48,75.26 48,80.51 49.27,81.77 DA2.1
REF  (via drill 0.8 pad 1.42)
  Top 0.254: C13.1 53.71,49.54 53.71,47.5 | 53.71,47.5 DA6.47 | 53.71,47.5 53.71,47.48 54.21,47.48 DA6.46 54.21,47.45 53.71,47.45 53.71,47.46 53.71,49.25 62.36,49.25 v62.36,49.29
  Top 0.406: DA8.3 C25.1
  Bottom 0.406: 62.37,48.78 v62.36,49.29 62.36,50.42 63,51.06 74.68,51.06 77.86,47.38 77.86,36.07 74.3,32.52 67.82,32.52 57.79,21.47 DA8.3
RESET
  Top 0.254: DA6.24 58.71,36.07 61.6,36.07 65.16,32.52 77.09,32.52 92.84,48.27 DA5.7
RS
  Bottom 0.406: X1.P$4 118.34,81.18 125.87,73.65 DA5.21
RW
  Bottom 0.406: X1.P$5 115.8,81.06 123.19,73.67 123.19,73.63 123.36,73.46 123.36,69.09 DA5.22
SCLK
  Top 0.254: DA6.34 64.57,43.23 70.62,49.29 83.45,49.29 85.22,51.06 DA5.4
V0CON
  Bottom 0.406: X1.P$3 120.88,84.08 124.64,80.32 126.28,80.32 R9.3

## Text on the board
Top: T
tNames: GND | +6V | X4 | DA6 | AINCOM | IDAC1 | GND
tValues: INA_OUT